# EAGLE board XT_001_Power (EAGLE 9.5.1)
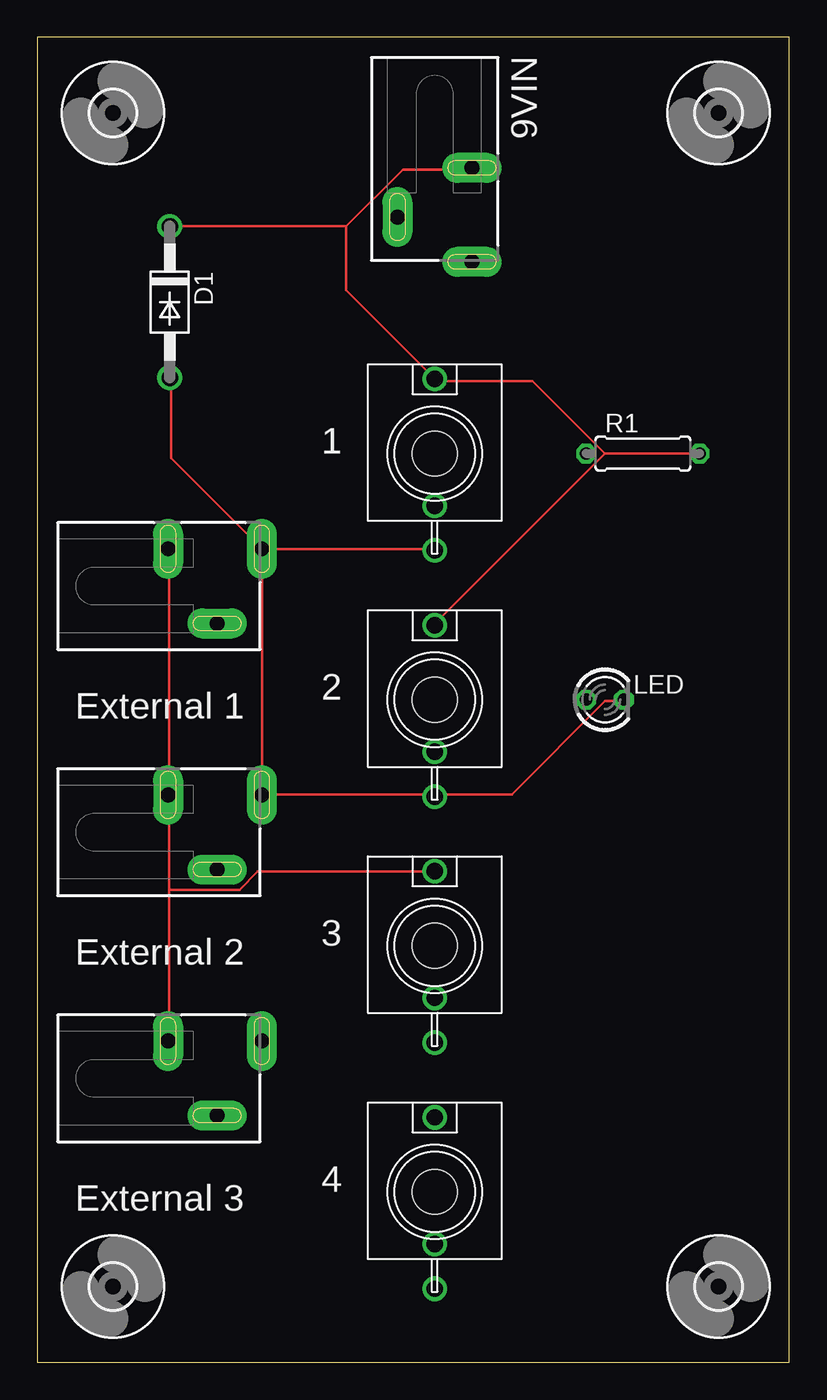
[diagram p0: board, top side]
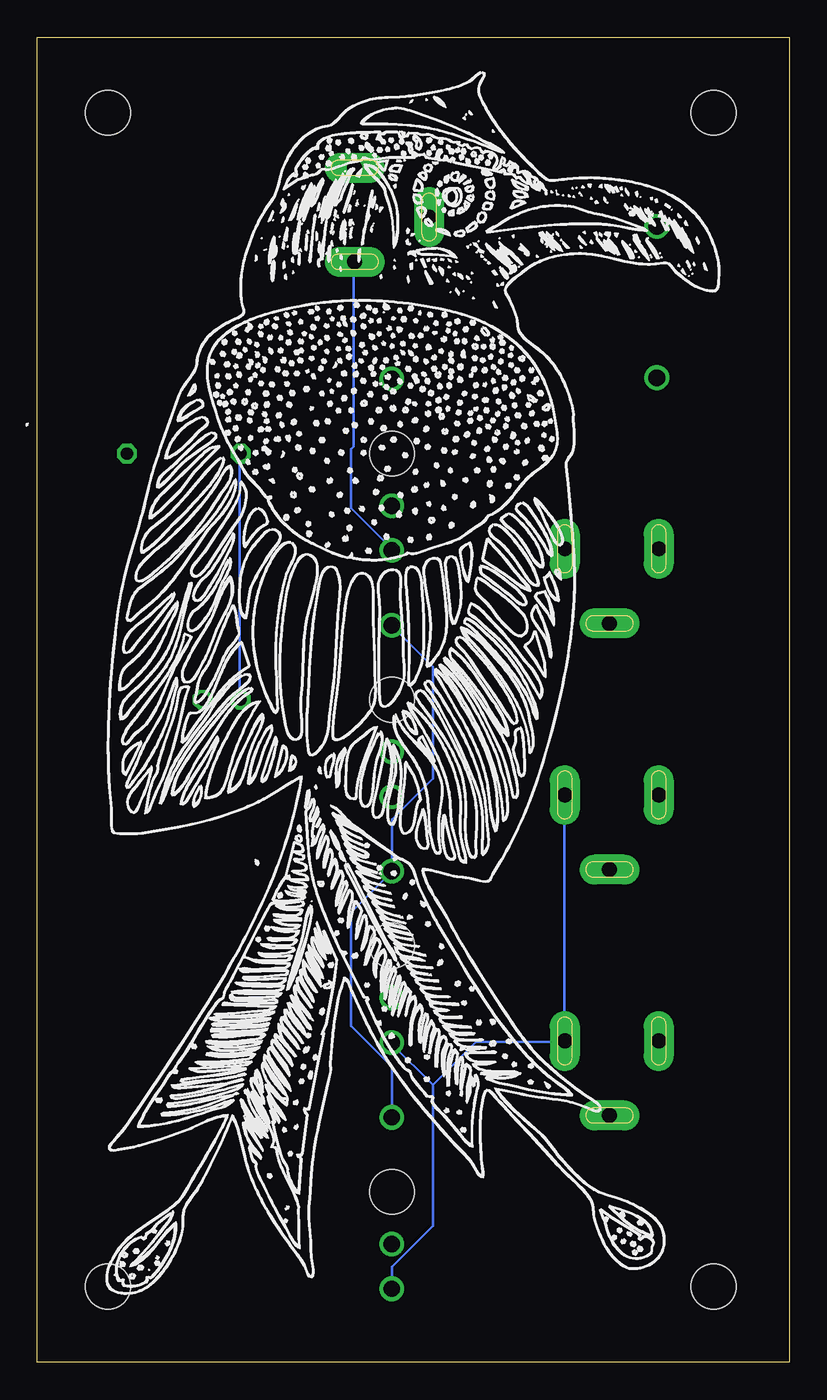
[diagram p1: board, bottom side, seen from below]

Size 50.47 x 88.89 mm. Coordinates in mm from the lower left corner, seen from the top.
Outline: 0,0 50.47,0 50.47,88.89 0,88.89 0,0
Copper layers (1*16): Top 0.035mm / dielectric 1.5mm / Bottom 0.035mm
Design rules "default": minimum track width 6mil, minimum drill 0.35mm, track to track 6mil, track to pad 6mil, pad to pad 6mil, via to via 6mil, smd to smd 6mil, copper to edge 40mil, drill to drill 6mil, minimum pad ring 10mil, minimum via ring 8mil, stop-mask expansion 4mil, vias tented up to drill 0mil, thermal gap 10mil
Holes 3 mm at 26.67,60.96 26.67,44.45 26.67,27.94 26.67,11.43

## Footprints (pad centres in the part's own frame; a part is rotated, then mirrored left to right if it is on the bottom)
WQP-PJ301M-12_JACK = drill 1.1: P$1 0,5; P$2 0,-3.5; P$3 0,-6.5
SCD-014-A = drill 1 pad 2 long: 1 -2.5,13.8; 2 -2.5,7.5; 3 2.5,10.8
DO41-10 = drill 1.118: A 5.08,0; C -5.08,0
3,0 = hole 3: 0,0
LED3MM = drill 0.813 octagon: A -1.27,0; K 1.27,0
0207/7 = drill 0.813 octagon: 1 -3.81,0; 2 3.81,0

## Placement (x,y rotation side)
1  [WQP-PJ301M-12_JACK]  26.67,60.96 0 top
2  [WQP-PJ301M-12_JACK]  26.67,44.45 0 top
3  [WQP-PJ301M-12_JACK]  26.67,27.94 0 top
4  [WQP-PJ301M-12_JACK]  26.67,11.43 0 top
9VIN  [SCD-014-A]  26.67,87.63 180 top
D1  1N4001  [DO41-10]  8.89,71.12 270 top
EXT1  [SCD-014-A]  1.27,52.07 270 top
EXT2  [SCD-014-A]  1.27,35.56 270 top
EXT3  [SCD-014-A]  1.27,19.05 270 top
H1  [3,0]  5.08,5.08 0 top
H2  [3,0]  45.72,5.08 0 top
H3  [3,0]  5.08,83.82 0 top
H4  [3,0]  45.72,83.82 0 top
LED  [LED3MM]  38.1,44.45 0 top
R1  4k7  [0207/7]  40.64,60.96 0 top

## Library data of the parts
1-4 = thonkiconn
9VIN EXT1-EXT3 = con-shiua-chyuan; OC_FARNELL: unknown; OC_NEWARK: unknown
D1 = diode
H1-H4 = holes
LED = led
R1 = rcl; SPICEPREFIX: R

## Nets
GND: 1.P$3 2.P$3 3.P$3 4.P$3 9VIN.1 D1.A EXT1.1 EXT2.1 EXT3.1 LED.K
N$1: LED.A R1.1
N$2: 1.P$1 2.P$1 3.P$1 4.P$1 9VIN.2 D1.C EXT1.2 EXT2.2 EXT3.2 R1.2

## Tracks (layer width: path | path; a pad name or v marks a point on that pad's centre or on a via)
GND
  Top 0.152: 15.09,54.56 26.67,54.56 1.P$3 | D1.A 8.99,65.99 8.99,60.66 14.94,54.71 EXT1.1 15.09,54.56 | 26.67,38.1 31.85,38.1 38.1,44.35 39.32,44.35 LED.K | 26.67,38.1 15.09,38.1 | 26.67,38.1 2.P$3 | 15.09,38.1 15.09,54.56 | 15.09,38.1 EXT2.1
  Bottom 0.152: 9VIN.1 29.26,73.76 29.26,61.42 29.41,61.27 29.41,57.3 26.67,54.56 1.P$3 | 4.P$3 26.67,6.4 23.93,9.14 23.93,18.59 | 23.93,18.59 26.67,21.34 3.P$3 | 23.93,18.59 21.03,21.49 15.09,21.49 EXT3.1 15.09,21.64 15.09,37.95 EXT2.1
N$1
  Bottom 0.152: LED.A 36.88,44.5 36.88,60.96 R1.1
N$2
  Top 0.152: 8.84,31.7 8.84,37.95 EXT2.2 8.84,38.1 8.84,54.56 EXT1.2 | 8.84,31.7 8.84,21.64 EXT3.2 | 8.84,31.7 13.56,31.7 14.78,32.92 26.67,32.92 3.P$1 | 20.73,76.2 D1.C | 20.73,76.2 24.54,80.01 29.11,80.01 9VIN.2 | 38.1,60.96 R1.2 | 38.1,60.96 33.22,65.84 26.67,65.84 1.P$1 26.67,65.99 20.73,71.93 20.73,76.2 | 38.1,60.96 26.67,49.53 2.P$1
  Bottom 0.152: 4.P$1 26.67,19.81 29.41,22.55 29.41,30.18 26.67,32.92 3.P$1 26.67,36.42 23.93,39.17 23.93,46.63 26.67,49.38 2.P$1

## Text on the board
tNames: 1 | 2 | External 1 | 3 | External 2 | 4 | External 3
tValues: VauxFlores XT-01 Power/Mult